# Altium PCB SMDiDCR.PcbDoc
Units mm, origin at the board's own origin, x right, y up, seen from the top; angles counter-clockwise.
Board outline 49.91 x 49.91 mm, 2 copper layers (Top Layer, Bottom Layer); 48 components, 24 nets, 110 pads, 0 vias.
Unrouted connection lines stored in the file: 49.
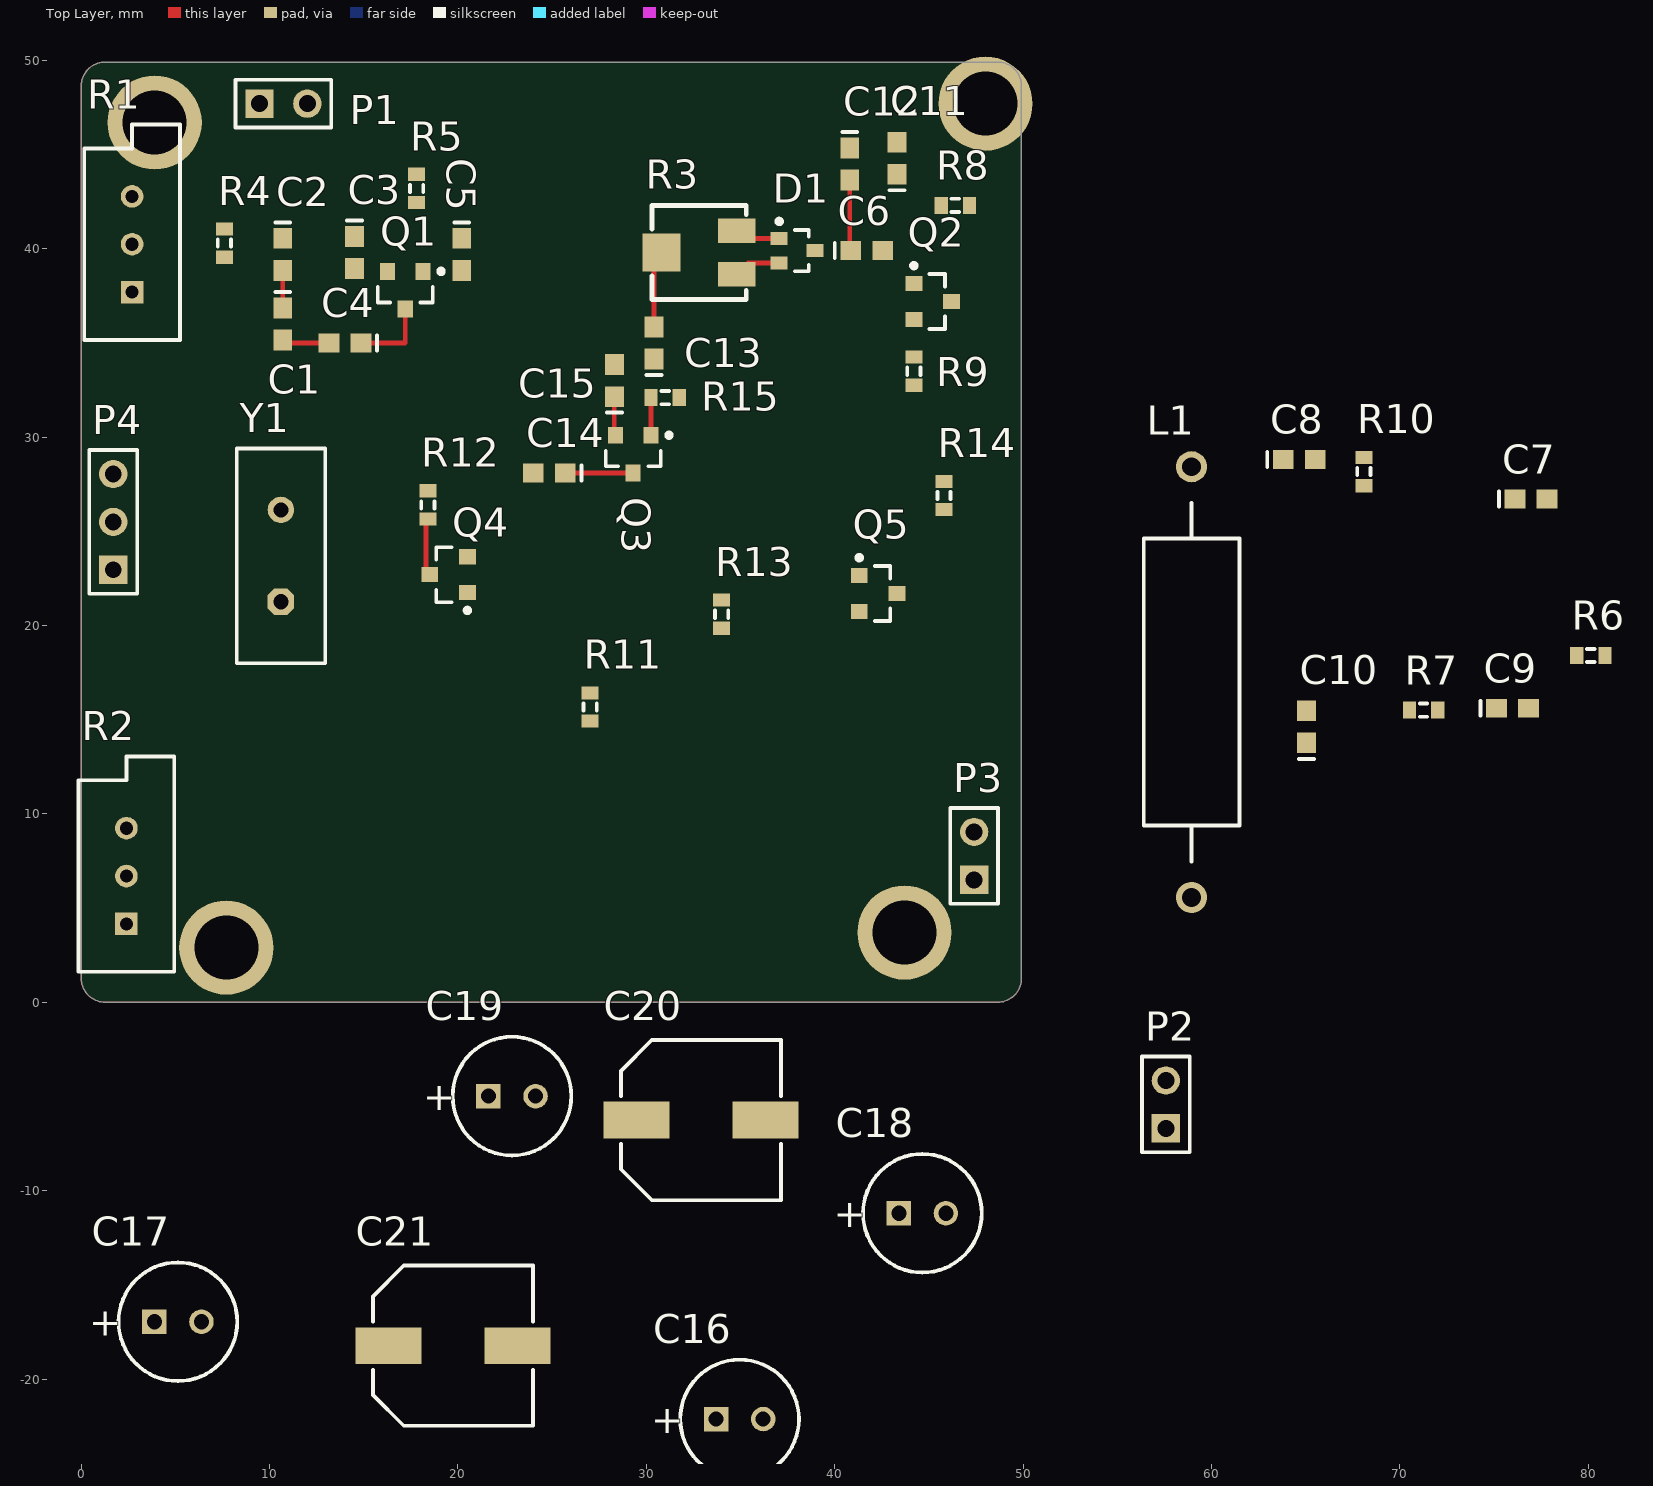
[diagram p0: Top Layer view]
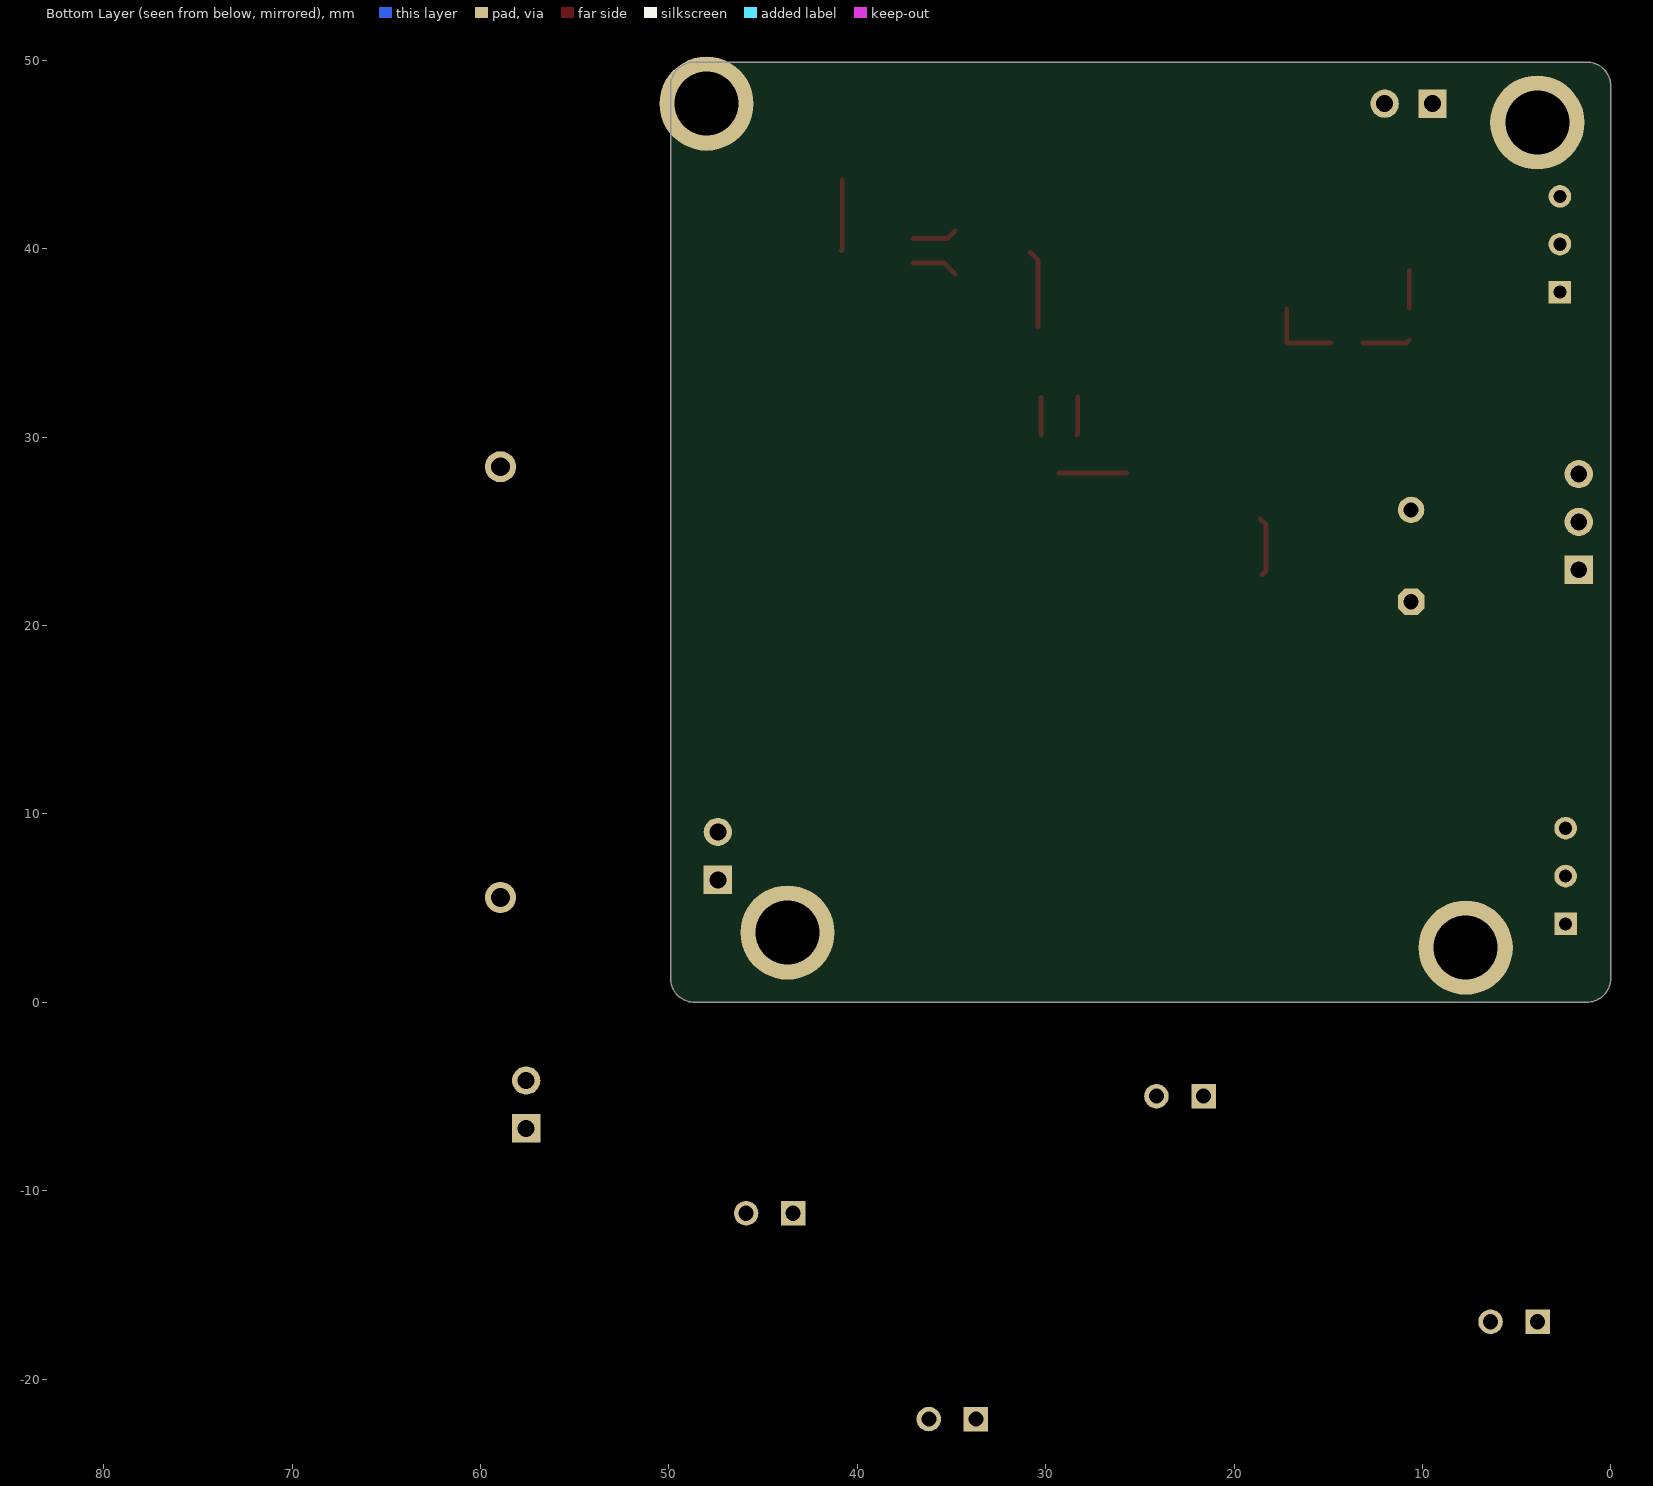
[diagram p1: Bottom Layer view, seen from below]

## Layer stack, top to bottom
Top Solder: solder mask 0.0102, Solder Resist, Dk 3.5
Top Layer: signal copper 0.0356
Dielectric 1: dielectric 0.32, FR-4, Dk 4.8
Bottom Layer: signal copper 0.0356
Bottom Solder: solder mask 0.0102, Solder Resist, Dk 3.5

## Board outline
0,1.27 0,48.641 cw(c1.27,48.641) 1.27,49.911 48.641,49.911 cw(c48.641,48.641) 49.911,48.641 49.911,1.27 cw(c48.641,1.27) 48.641,0 1.27,0 cw(c1.27,1.27)

## Design rules (kind name [scope] priority, off if disabled: settings)
Clearance [All] p1: gap=0.254 ignorepadtopadclearanceinfootprint=FALSE except(0: Arc-Hole Track-Hole SMDPad-Hole THPad-Hole Via-Hole Fill-Hole Poly-Hole Region-Hole Text-Hole)
PolygonConnect [All] p1: connectstyle=Relief reliefconductorwidth=0.254 reliefentries=4 polygonreliefangle="90 Angle" airgapwidth=0.254
RoutingVias [All] p1: holewidth=0.711 width=1.27 viastyle="Through Hole" minholewidth=0.711 minwidth=1.27 maxholewidth=0.711 maxwidth=1.27
SolderMaskExpansion [All] p1: expansion=0.102
Width [All] p1: maxlimit=0.254 minlimit=0.254 preferedwidth=0.254
30 further rules are at their usual default settings.

## Components (designator, comment, footprint, x,y, rotation, side; value= is the part's Value field where it differs from the comment)
C1 "C0603" 0603 10.7,36 r270 top value=33pF
C2 "C0603" 0603 10.7,39.7 r270 top value=470pF
C3 "C0603" 0603 14.5,39.8 r270 top value=100nF
C4 "C0603" 0603 14,35 r180 top value=100nF
C5 "C0603" 0603 20.2,39.7 r270 top value=100nF
C6 "C0603" 0603 41.7,39.9 r0 top value=100nF
C7 "C0603" 0603 76.961,26.708 r0 top value=150pF
C8 "C0603" 0603 64.657,28.808 r0 top value=180pF
C9 "C0603" 0603 75.982,15.608 r0 top value=100nF
C10 "C0603" 0603 65.035,14.619 r90 top value=100nF
C11 "C0603" 0603 43.3,44.8 r90 top value=100pF
C12 "C0603" 0603 40.8,44.5 r270 top value=100nF
C13 "C0603" 0603 30.4,35 r90 top value=100nF
C14 "C0603" 0603 24.85,28.1 r180 top value=120pF
C15 "C0603" 0603 28.3,33 r90 top value=100nF
C16 "ECA1HM470" CAPPR55-250-1120X630X1220 34.95,-22.125 r0 top
C17 "ECA1HM470" CAPPR55-250-1120X630X1220 5.132,-16.959 r0 top
C18 "ECA1HM470" CAPPR55-250-1120X630X1220 44.65,-11.2 r0 top
C19 "ECA1HM470" CAPPR55-250-1120X630X1220 22.866,-4.984 r0 top
C20 "UCL1V101MNL1GS" NIC-UCL1V101MNL1GS_L 32.899,-6.254 r0 top
C21 "UCL1V101MNL1GS" NIC-UCL1V101MNL1GS_L 19.737,-18.229 r0 top
D1 "BAV99WT1G" ONSC-SOT-323-3-419-04_V 38,39.9 r0 top
L1 "Inductor Iron" AXIAL-0.9 58.942,16.997 r90 top value=6.6uH
P1 "RF In" HDR1X2 9.46,47.7 r0 top
P2 "AF Out" HDR1X2 57.576,-6.694 r90 top
P3 "Power" HDR1X2 47.4,6.5 r90 top
P4 "Varicap" HDR1X3 1.7,22.96 r90 top
Q1 "MMBFJ310LT3G" ONSC-SOT-23-3-318-08_V 17.2,37.8 r270 top
Q2 "MMBFJ310LT3G" ONSC-SOT-23-3-318-08_V 45.2,37.2 r0 top
Q3 "MMBFJ310LT3G" ONSC-SOT-23-3-318-08_V 29.3,29.1 r270 top
Q4 "MMBT3904LT3G" ONSC-SOT-23-3-318-08_V 19.5,22.7 r180 top
Q5 "MMBT3904LT3G" ONSC-SOT-23-3-318-08_V 42.3,21.7 r0 top
R1 "RPot" VR5 2.7,40.24 r90 top value=10K
R2 "RPot" VR5 2.4,6.7 r90 top value="10K LOG"
R3 "1k SMD" POT4MM-2 32.8,39.8 r180 top value=1k
R4 "Res3" J1-0603 7.6,40.3 r270 top value=1K
R5 "Res3" J1-0603 17.8,43.2 r270 top value=100R
R6 "Res3" J1-0603 80.134,18.408 r0 top value=1K
R7 "Res3" J1-0603 71.258,15.508 r0 top value=1K
R8 "Res3" J1-0603 46.4,42.3 r0 top value=10K
R9 "Res3" J1-0603 44.2,33.5 r90 top value=100R
R10 "Res3" J1-0603 68.086,28.173 r90 top value=1K
R11 "Res3" J1-0603 27.019,15.673 r90 top value=10K
R12 "Res3" J1-0603 18.4,26.4 r90 top value=680R
R13 "Res3" J1-0603 34,20.6 r90 top value=10K
R14 "Res3" J1-0603 45.8,26.9 r90 top value=1K
R15 "Res3" J1-0603 31,32.1 r0 top value=1K
Y1 "HC49" HC-49U 10.6,23.7 r90 top

## Footprints (in the part's own frame and the unit in brackets; to place one, negate y for a bottom-side part, rotate by r counter-clockwise, add the part's x,y. Pads: shape width x height; smd on the part's side, far side on the other; paste and mask are expansions set on the pad)
0603 [mm] "Chip Capacitor; Body 1.6 x 0.8 mm (LxW typ)"
  rect 1.1x1 smd: 1(-0.85,0) 2(0.85,0)
  silkscreen extent -1.7,-0.4 -1.7,0.4
AXIAL-0.9 [mm] "Axial Device, Thru-Hole; 2 Leads; 0.9 in Pin Spacing"
  round 1.65 hole 1: 1(-11.43,0) 2(11.43,0)
  silkscreen extent -9.53,-2.54 9.53,2.54
CAPPR55-250-1120X630X1220 [mm] "THD, 2-Leads, Dia 6.3mm, Body Length 11.2mm"
  rect 1.3x1.3 hole 0.8: 1(-1.25,0)
  round 1.3 hole 0.8: 2(1.25,0)
  silkscreen extent -3.15,-3.15 3.15,3.15, body extent -3.15,-3.15 3.16,3.15, height 12.21
HC-49U [mm] "Quartz Crystal, Thru-Hole; 2 Leads; Body 11.35 x 4.65 x 13.46 mm (LxWxH max)"
  oct 1.4x1.4 hole 0.8: 1(-2.44,0)
  round 1.4 hole 0.8: 2(2.44,0)
  silkscreen extent -5.7,-2.35 5.7,2.35
HDR1X2 [mm] "Connector; Header; 2 Position"
  rect 1.5x1.5 hole 0.9: 1(0,0)
  round 1.5 hole 0.9: 2(2.54,0)
  silkscreen extent -1.27,-1.27 3.81,1.27
HDR1X3 [mm] "Connector; Header; 3 Position"
  rect 1.5x1.5 hole 0.9: 1(0,0)
  round 1.5 hole 0.9: 2(2.54,0) 3(5.08,0)
  silkscreen extent -1.27,-1.27 6.35,1.27
J1-0603 [mm] "Chip Resistor, Body 1.6x0.8mm, IPC High Density"
  rect 0.7x0.9 smd: 1(-0.75,0) 2(0.75,0)
  silkscreen extent -0.2,-0.35 0.2,0.35, body extent -0.85,-0.48 0.85,0.48, height 0.9
NIC-UCL1V101MNL1GS_L [mm] "Aluminum Electrolytic Capacitor, Body 8.5x8.5x10.80mm, IPC High Density"
  rect 3.5x1.95 smd: 1(-3.425,0) 2(3.425,0)
  silkscreen extent -4.25,-4.25 4.25,4.25, body extent -4.65,-4.25 4.65,4.25, height 10.8
ONSC-SOT-23-3-318-08_V [mm] "SOT23, 3-Leads, Body 2.92x1.3mm, Pitch 0.95mm"
  rect 0.9x0.8 smd: 1(-1,0.95) 2(-1,-0.95) 3(1,0)
  silkscreen extent -1.12,-1.46 0.65,2.03, body extent -0.65,-1.46 0.65,1.46, height 1.11
ONSC-SOT-323-3-419-04_V [mm] "SOT23, 3-Leads, Body 2x1.25mm, Pitch 0.65mm"
  rect 0.9x0.7 smd: 1(-0.95,0.65) 2(-0.95,-0.65) 3(0.95,0)
  silkscreen extent -1.07,-1.1 0.63,1.67, body extent -0.63,-1 0.63,1, height 1
POT4MM-2 [mm] "Square Trimming Potentiometer"
  rect 2x1.3 smd: CCW(-2,-1.15) CW(-2,1.15)
  rect 2x2 smd: W(2,0)
  silkscreen extent -2.5,-2.5 2.5,2.5
VR5 [mm] "Thru-Hole; 3 Leads"
  rect 1.2x1.2 hole 0.7: 1(-2.54,0)
  round 1.2 hole 0.7: 2(0,0) 3(2.54,0)
  silkscreen extent -5.08,-2.54 6.35,2.54

## Part data
C1 C2 C3 C4 C5 C6 C7 C8 C9 C10 C11 C12 C13 C14 C15: "Ceramic Chip Capacitor - Standard", PackageDocument=Mar-2001, Code_IPC="1608 [0603]", Code_JEITA=0603, ComponentLink1Description="Manufacturer Link", ComponentLink1URL=http://www.kemet.com/, ComponentLink2Description=Datasheet, ComponentLink2URL=http://www.kemet.com/kemet/web/homepage/kechome.nsf/vapubfilesname/F3102TA.pdf/$file/F3102TA.pdf, DatasheetDocument=Mar-2001, LatestRevisionDate=19-Mar-2004, LatestRevisionNote="Silkscreen size reduced.", Note="Footprint corresponds to dimensions for bulk cassette packaging. This case size has tightened tolerances.", PackageReference=0603, Published=17-Jul-2002, Publisher="Altium Limited"
C16 C17 C18 C19: library part CMP-2100-03626-1, "Aluminum Electrolytic Capacitor, 47 uF, +/- 20%, 50 V, -40 to 85 degC, 2-Pin THD, RoHS, Bulk", Capacitance=47uF, Case/Package=Radial, Leakage Current=3uA, Manufacturer=Panasonic, Max Operating Temperature=85degC, Min Operating Temperature=-40degC, Package Description="2-Pin Radial Lead, Dia 6.3 mm, Height 12.2 mm", Package Quantity=200, Package Reference=CAPPR55-250-1120X630X1220, Ripple Current=130mA, Tolerance=20%, Voltage=50V, Datasheet URL=https://industrial.panasonic.com/cdbs/www-data/pdf/RDF0000/ABA0000C1218.pdf, Datasheet Version="Rev. 05, 10/2016", Diameter=6.3mm, Dissipation Factor=0.12%, Height=11.2mm, Height - Seated (Max)=0.48inch, Lead/Base Style=Straight, Lead Diameter=0.5mm, Lead Pitch=2.5mm, Length=11.2mm, Life (Hours)=2000Hour, Manufacturer URL=http://www.panasonic.com/, Mount=ThroughHole, Packaging=Bulk, Radiation Hardening=No, REACH SVHC=NoSVHC, RoHSCompliant=true, Termination=Radial, Voltage Rating=50V, Voltage Rating (DC)=50V
C20 C21: library part CMP-2000-07344-1, "Aluminum Electrolytic Capacitor, 100 uF, 35 V, 20%, -55 to 105 degC, 2-Pin SMD, RoHS, Tape and Reel", Capacitance=100uF, Case Diameter=8mm, Case Height=8.3mm, Case Length=10mm, Leakage Current=3uA, Manufacturer=Nichicon, Maximum Operating Temperature=+105C, Minimum Operating Temperature=-55C, Operating Temperature Range=-55Cto+105C, Package Description="2-Pin Surface Mount Device, Body 8.3 x 8.3 mm, Height 10.8 mm", Ripple Current=850mA, Tolerance=20%, Voltage Rating=35V, Brand=Nichicon, Datasheet URL=http://datasheet.octopart.com/UCL1V101MNL1GS-Nichicon-datasheet-41194108.pdf, Datasheet Version=01/2015, Dimensions=8mmDia.x10mmLx8.3mmH, Dissipation Factor DF=0.12, Factory Pack Quantity=500, Load Life=2000h, Manufacturer URL=http://www.nichicon.co.jp/english/, Mounting Technology=SurfaceMount, Package Reference=UCL1V101MNL1GS, Packaging=Reel, Product=LowImpedanceElectrolyticCapacitors, Product Category=AluminumElectrolyticCapacitors-SMD, RoHS=Details, Series=CL, Termination Style=SMD/SMT, Type=AluminumElectrolyticCapacitors,ChipType,LowImpedance, Voltage Rating DC=35V
D1: library part CMP-1054-00187-1, "Dual Series Switching Diodes, 3-Pin SOT-323, Pb-Free, Tape and Reel", Manufacturer="On Semiconductor", ComponentLink1Description="Manufacturer URL", ComponentLink1URL=http://www.onsemi.com/, ComponentLink2Description=Datasheet, ComponentLink2URL=http://www.onsemi.cn/pub_link/Collateral/BAV99WT1-D.PDF, ComponentLink3Description="Package Specification", ComponentLink3URL=http://www.onsemi.com/pub_link/Collateral/419-04.PDF, Configuration="Dual Series", DatasheetVersion="Rev. 7", IF Max (A)=0.215, Mounting Technology="Surface Mount", PackageDescription="3-Pin Small Outline Transistor, Body 2 x 1.25 mm, Pitch 0.65 mm", PackageReference=SOT-323-3-419-04, PackageVersion="Rev. N, 11/2008", Packing="Tape and Reel", PartNumber=BAV99WT1G, RoHS=TRUE, trr Max (ns)=6
L1: "Magnetic-Core Inductor", LatestRevisionDate=17-Jul-2002, LatestRevisionNote="Re-released for DXP Platform.", PackageDescription="Axial Device, Thru-Hole; 2 Leads; 0.9 in Pin Spacing", PackageReference=AXIAL-0.9, Published=24-Mar-1999, Publisher="Altium Limited"
P1 P2 P3: library part "Header 2", "Header, 2-Pin", LatestRevisionDate=17-Jul-2002, LatestRevisionNote="Re-released for DXP Platform.", Publisher="Altium Limited"
P4: library part "Header 3", "Header, 3-Pin", LatestRevisionDate=17-Jul-2002, LatestRevisionNote="Re-released for DXP Platform.", Publisher="Altium Limited"
Q1 Q2 Q3: library part CMP-1062-00032-1, "JFET - VHF / UHF Amplifier Transistor, N-Channel, 3-Pin SOT-23, Pb-Free, Tape and Reel", Manufacturer="On Semiconductor", Channel Polarity="N Channel", Ciss Max (pF)=5, ComponentLink1Description="Manufacturer URL", ComponentLink1URL=http://www.onsemi.com/, ComponentLink2Description=Datasheet, ComponentLink2URL=http://www.onsemi.cn/pub_link/Collateral/MMBFJ309LT1-D.PDF, ComponentLink3Description="Package Specification", ComponentLink3URL=http://www.onsemi.cn/pub_link/Collateral/318-08.PDF, Crss Max (pF)=2.5, DatasheetVersion="Rev. 7", IDSS Max (uA)=60000, IDSS Min (uA)=24000, Mounting Technology="Surface Mount", PackageDescription="3-Pin Small Outline Transistor, Body 2.92 x 1.3 mm, Pitch 0.95 mm", PackageReference=SOT-23-3-318-08, PackageVersion="Rev. AP, 11/2009", Packing="Tape and Reel", PartNumber=MMBFJ310LT3G, RoHS=Pb-Free, V(BR)GSS Min (V)=25
Q4 Q5: library part CMP-1048-00630-1, "General Purpose Transistor, NPN Silicon, 3-Pin SOT-23, Pb-Free, Tape and Reel", Manufacturer="On Semiconductor", ComponentLink1Description="Manufacturer URL", ComponentLink1URL=http://www.onsemi.com/, ComponentLink2Description=Datasheet, ComponentLink2URL=http://www.onsemi.cn/pub_link/Collateral/MMBT3904LT1-D.PDF, ComponentLink3Description="Package Specification", ComponentLink3URL=http://www.onsemi.cn/pub_link/Collateral/318-08.PDF, DatasheetVersion="Rev. 12", fT Min (MHz)=300, IC Continuous (A)=0.2, Mounting Technology="Surface Mount", PackageDescription="3-Pin Small Outline Transistor, Body 2.92 x 1.3 mm, Pitch 0.95 mm", PackageReference=SOT-23-3-318-08, PackageVersion="Rev. AP, 11/2009", Packing="Tape and Reel", PartNumber=MMBT3904LT3G, Polarity=NPN, RoHS=TRUE
R1 R2: "Potentiometer", LatestRevisionDate=17-Jul-2002, LatestRevisionNote="Re-released for DXP Platform.", PackageDescription="Variable Resistor, Thru-Hole; 3 Leads", PackageReference=VR5, Published=8-Jun-2000, Publisher="Altium Limited", Set Position=0.5, Sim Note="Enter the Resistance value and the set point into parameter fields."
R3: library part "RPot SM", "Square Trimming Potentiometer", ComponentLink1Description="Manufacturer Link", ComponentLink1URL=http://bourns.com/2/search.html, DatasheetVersion=Oct-2003, PackageDescription="Square Trimming Potentiometer", PackageReference=POT4MM-2, Published=17-Dec-2003, Publisher="Altium Limited"
R4 R5 R6 R7 R8 R9 R10 R11 R12 R13 R14 R15: "Resistor", LatestRevisionDate=29-May-2009, LatestRevisionNote="IPC-7351 Footprint Added.", PackageDescription="Chip Resistor", PackageReference=J1-0603, Published=8-Jun-2000, Publisher="Altium Limited"
Y1: library part ECS-10-13-1, "Crystal Oscillator", ComponentLink1Description="Manufacturer Link", ComponentLink1URL=http://www.ecsxtal.com/, ComponentLink2Description=Datasheet, ComponentLink2URL=http://www.ecsxtal.com/pdf2/HC49U.PDF, DatasheetDocument=18-Apr-2000, PackageReference=HC-49U, Published=17-Jul-2002, Publisher="Altium Limited"

## Free pads (board coordinates)
  round 5 hole 3.4: 1(43.7,3.7) 2(7.7,2.9) 3(3.9,46.7) 4(48,47.7)

## Nets (pads, with @x,y where several pads share a name; then routed paths per layer and width w, separated by ;. In a path a pad name is that pad's centre, name@x,y a point inside that pad or via, vN(x,y) a via of type N, cw(c..) or ccw(c..) an arc to the next point about the centre after c; other vN are vias at no path point)
GND: C2.1 C3.1 C8.1 C12.1 C15.2 C16.2 C17.2 C18.2 C19.2 C20.2 C21.2 P1.2 P2.2 P3.2 P4.1 P4.3 pad.1 pad.2 pad.3 pad.4 R1.2 R2.2 R4.1 R5.1 R8.1 R9.1 R10.1 R13.1 R14.1
NetC1_1: C1.1 C2.2 R1.3 | length 2
  Top Layer w0.254: C1.1 C2.2
NetC1_2: C1.2 C4.2 | length 2.5
  Top Layer w0.254: C1.2 10.85,35 C4.2
NetC3_2: C3.2 Q1.2 R5.2
NetC4_1: C4.1 Q1.3 | length 4.2
  Top Layer w0.254: C4.1 17.2,35 Q1.3
NetC5_2: C5.2 Q1.1 R6.1
NetC6_1: C6.1 C12.2 D1.3 | length 3.8
  Top Layer w0.254: C12.2 40.8,39.95 C6.1
NetC6_2: C6.2 Q2.3 R8.2
NetC7_1: C7.1 C8.2 C14.2 Q4.2 R10.2
NetC7_2: C7.2 Q4.1 R11.1 Y1.1
NetC9_1: C9.1 C10.1 C11.1 Q2.1 R7.1
NetC9_2: C9.2 C10.2 C11.2
NetC13_1: C13.1 Q3.1 R15.1 | length 2
  Top Layer w0.254: Q3.1 R15.1
NetC13_2: C13.2 R3.W | length 4.1
  Top Layer w0.254: C13.2 30.4,39.4 R3.W
NetC14_1: C14.1 Q3.3 R13.2 | length 3.6
  Top Layer w0.254: C14.1 Q3.3
NetC15_1: C15.1 Q3.2 R14.2 | length 2.1
  Top Layer w0.254: C15.1 28.3,30.15 Q3.2
NetC16_1: C16.1 Q2.2 R9.2
NetD1_1: D1.1 R3.CCW | length 2.4
  Top Layer w0.254: R3.CCW 35.2,40.55 D1.1
NetD1_2: D1.2 R3.CW | length 2.5
  Top Layer w0.254: R3.CW 35.4,39.25 D1.2
NetL1_1: L1.1 P4.2
NetL1_2: L1.2 Y1.2
NetP1_1: P1.1 R1.1 R4.2
NetQ4_3: Q4.3 R11.2 R12.1 | length 3.2
  Top Layer w0.254: Q4.3 18.3,22.9 18.3,25.35 R12.1@18.6,25.65
VCC: C17.1 C18.1 C19.1 C20.1 C21.1 P3.1 R6.2 R7.2 R12.2 R15.2
pads on no net: C5.1 P2.1 Q5.1 Q5.2 Q5.3 R2.1 R2.3

## Polygon pours and split planes (outlines as drawn)
GND on Top Layer "Bottom Layer-GND" (solid, shelved, pour order 1): 0,1.27 0,48.641 cw(c1.27,48.641) 1.27,49.911 48.641,49.911 cw(c48.641,48.641) 49.911,48.641 49.911,1.27 cw(c48.641,1.27) 48.641,0 1.27,0 cw(c1.27,1.27)
GND on Top Layer "Top Layer-GND" (solid, shelved, pour order 0): 0,1.27 0,48.641 cw(c1.27,48.641) 1.27,49.911 48.641,49.911 cw(c48.641,48.641) 49.911,48.641 49.911,1.27 cw(c48.641,1.27) 48.641,0 1.27,0 cw(c1.27,1.27)

## Silkscreen, mask and mechanical layers (free items; w line width, h text height)
Mechanical 1:
  lines w0.5: 0,1.27 ccw(c1.27,1.27) 1.27,0 48.641,0 ccw(c48.641,1.27) 49.911,1.27 49.911,48.641 ccw(c48.641,48.641) 48.641,49.911 1.27,49.911 ccw(c1.27,48.641) 0,48.641 0,6.35 0,1.27

## Text inside footprints (layer, text, board x,y; h text height)
C16: Top Overlay "+" at 30.25,-22.875 h1.5
C17: Top Overlay "+" at 0.432,-17.709 h1.5
C18: Top Overlay "+" at 39.95,-11.95 h1.5
C19: Top Overlay "+" at 18.166,-5.734 h1.5